# Altium PCB PCB_Mach_DK_Relay_1_Kenh.PcbDoc
Units mil, origin at the board's own origin, x right, y up, seen from the top; angles counter-clockwise.
Board outline 2685 x 1765 mil, 2 copper layers (Top Layer, Bottom Layer); 24 components, 19 nets, 81 pads, 0 vias.
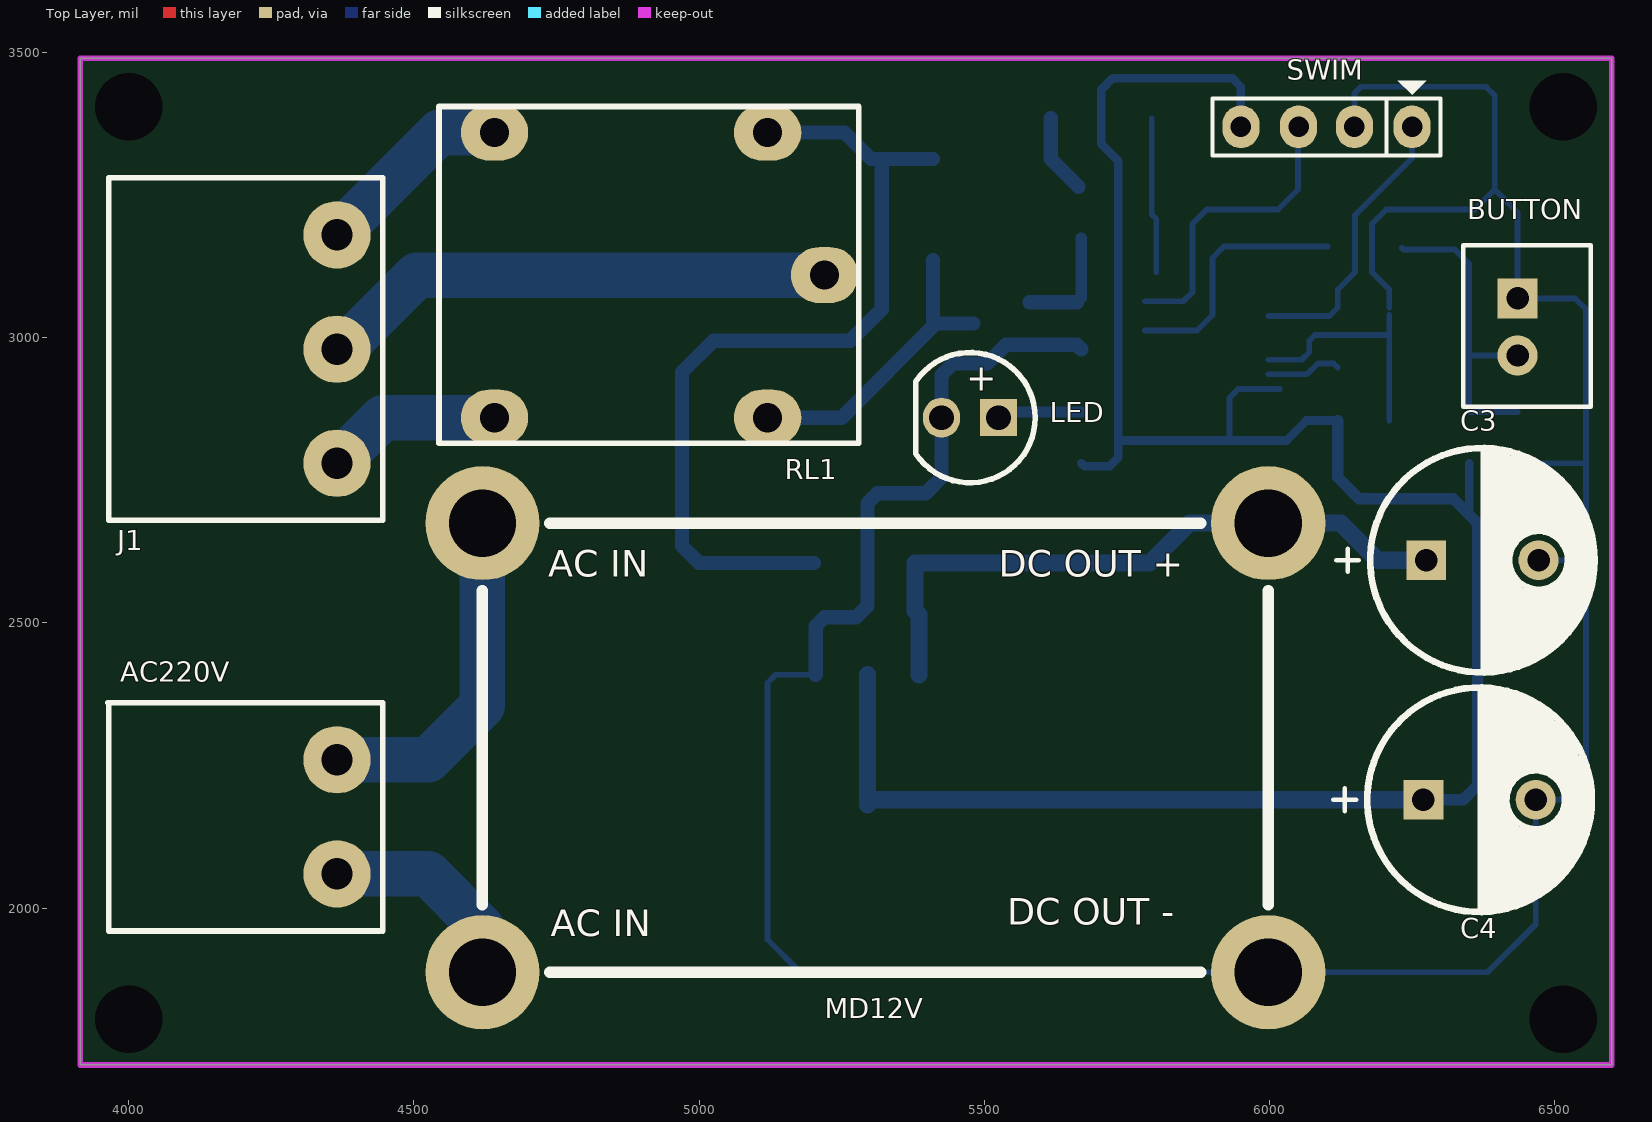
[diagram p0: Top Layer view]
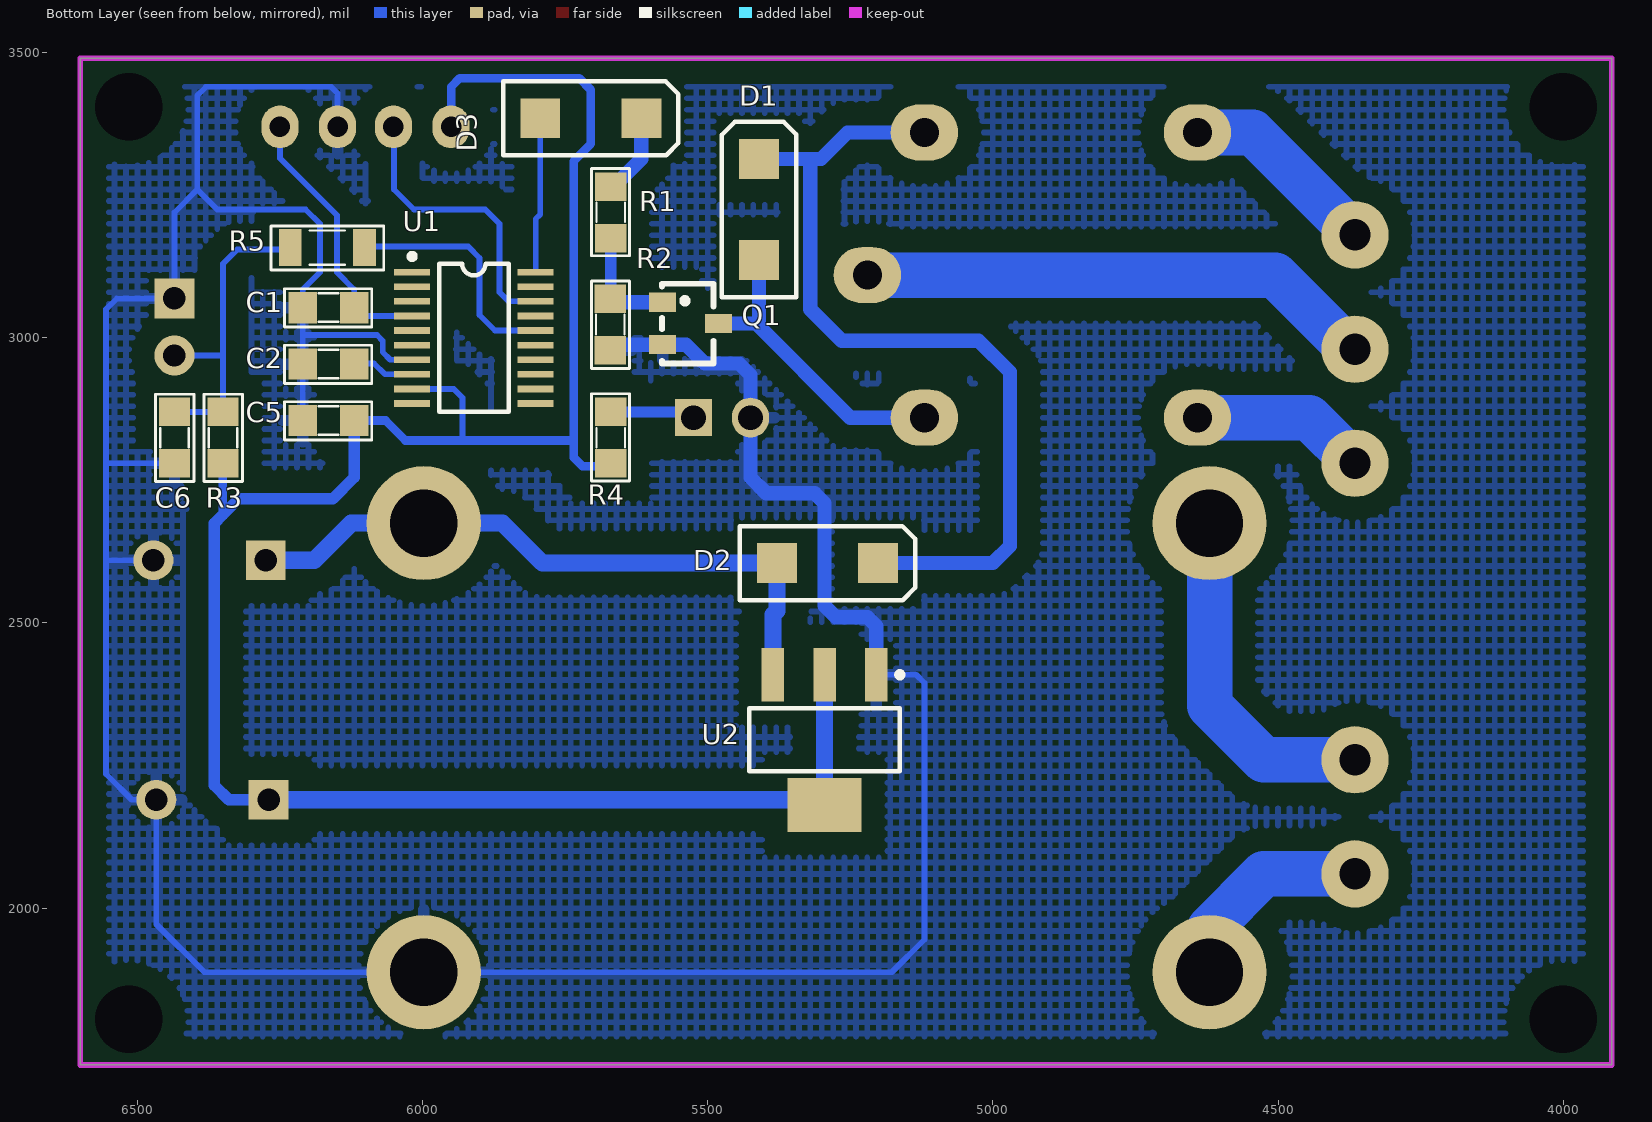
[diagram p1: Bottom Layer view, seen from below]

## Layer stack, top to bottom
Top Solder: solder mask 0.4, Solder Resist, Dk 3.5
Top Layer: signal copper 1.4
Dielectric 1: dielectric 12.6, FR-4, Dk 4.8
Bottom Layer: signal copper 1.4
Bottom Solder: solder mask 0.4, Solder Resist, Dk 3.5

## Board outline
3915,1725 6600,1725 6600,3490 3915,3490

## Design rules (kind name [scope] priority, off if disabled: settings)
Clearance [All] p1: gap=35
PolygonConnect [All] p1: connectstyle=Relief reliefconductorwidth=20 reliefentries=4 polygonreliefangle="90 Angle" airgapwidth=10
RoutingVias [All] p1: holewidth=28 width=50 viastyle="Through Hole" minholewidth=28 minwidth=50 maxholewidth=28 maxwidth=50
SolderMaskExpansion [All] p1: expansion=4
Width [All] p1: maxlimit=100 minlimit=10 preferedwidth=10
30 further rules are at their usual default settings.

## Components (designator, comment, footprint, x,y, rotation, side; value= is the part's Value field where it differs from the comment)
AC220V "POWER" "BIG_Header 2" 4365,2060 r90 top
BUTTON "Header 2" "Header 2 Duc Thang 2.54" 6435,3065 r0 top
C1 "104" "Tu 0805" 6165,3053 r180 bottom
C2 "105" "Tu 0805" 6165,2954 r180 bottom
C3 "470uF" "Tu Hoa 450uF - 16V" 6365,2615 r0 top
C4 "470uF" "Tu Hoa 450uF - 16V" 6360,2195 r0 top
C5 "104" "Tu 0805" 6165,2855 r180 bottom
C6 "104" "Tu 0805" 6435,2825 r90 bottom
D1 "M7" SMB 5410,3225 r270 bottom
D2 "M7" SMB 5290,2605 r0 bottom
D3 "M7" SMB 5705,3385 r0 bottom
J1 "BIG_Header 3" "BIG_Header 3" 4365,2780 r90 top
LED "LED3" "LED RED 5mm" 5475,2860 r180 top
MD12V "Module Driver LED 1x3W" "Module Driver LED" 4620,2675 r0 top
Q1 "C1815" SOT23B 5535,3020 r270 bottom
R1 "1k" "Tro SMD 0805" 5670,3220 r270 bottom
R2 "10k" "Tro SMD 0805" 5671,3023.5 r90 bottom
R3 "10k" "Tro SMD 0805" 6350,2825 r90 bottom
R4 "1k" "Tro SMD 0805" 5670,2825 r270 bottom
R5 "0R" "1206 SMD" 6165,3155 r0 bottom
RL1 "Relay ?V - 10A" RELAY5PIN-10A 5220,3110 r90 top
SWIM "JP4" JP4 6150,3370 r180 top
U1 "STM8S003F3 UFQFPN20P" TSSOP20 5910,3000 r270 bottom
U2 "AMS1117-5V" SOT223-4N 5295,2295 r270 bottom

## Footprints (in the part's own frame and the unit in brackets; to place one, negate y for a bottom-side part, rotate by r counter-clockwise, add the part's x,y. Pads: shape width x height; smd on the part's side, far side on the other; paste and mask are expansions set on the pad)
"1206 SMD" [mil]
  rect 40x65 smd: 1(-63,-3) 2(67,-3)
  silkscreen extent -97,-41 101,36, body extent -81,-38 85,33, height 25
"BIG_Header 2" [mm]
  round 3 hole 1.4: 1(0,0) 2(5.08,0)
  silkscreen extent -2.54,-2.03 7.62,10.21, body extent -2.5,-1.75 7.58,10.25, height 3.15
"BIG_Header 3" [mm]
  round 3 hole 1.4: 1(0,0) 2(5.08,0) 3(10.173,0)
  silkscreen extent -2.54,-2.03 12.71,10.16, body extent -2.5,-1.75 12.67,10.25, height 3.15
"Header 2 Duc Thang 2.54" [mil]
  rect 70x70 hole 39.37 unplated: 1(0,4)
  round 70 hole 39.37 unplated: 2(0,-96)
  silkscreen extent -95,-186 128,97, body extent -70,-156 107,76, height 237
JP4 [mil] "Jumper 4"
  oval 65x75 hole 36: 1(-100,0) 2(1,0) 3(99,0) 4(200,0)
  silkscreen extent -150,-81 250,50, body extent -148,-48 248,50, height 323
"LED RED 5mm" [mil] "LED phi 5mm"
  rect 65x65 hole 43.31: 1(-50,0)
  oval 65x70 hole 43.31: 2(50,0)
  silkscreen extent -114,-114 95,114, body extent -118,-118 98,118, height 353
"Module Driver LED" [mm]
  round 5.08 hole 3: 1(0,0) 2(0,-20) 3(35,0) 4(35,-20)
  silkscreen extent 0,-20 35,0
RELAY5PIN-10A [mm]
  oval 2.5x3 hole 1.3: 1(0,0) 2(-6.35,14.7) 3(6.35,14.7) 4(-6.35,2.54) 5(6.35,2.54)
  silkscreen extent -7.49,-1.52 7.51,17.18, body extent -7.49,-1.52 7.49,17.14, height 16
SMB [mil]
  rect 70x70 smd: 1(88.58,0) 2(-88.58,0)
  silkscreen extent -154,-65 154,65, body extent -102,-51 102,51, height 95
SOT23B [mm] "SOT 23B"
  rect 0.85x1.2 smd: 1(-1.077,-1.123) 2(-0.127,1.377) 3(0.813,-1.118)
  silkscreen extent -1.91,-1.14 1.65,1.14, body extent -1.63,-1.17 1.37,1.33, height 1.06
SOT223-4N [mm] "SOT223, 4-Leads, Body 6.5x3.5mm, Pitch 2.3mm, Lead Span 7mm, IPC Medium Density"
  rect 2.4x1 smd: 1(-2.9,2.3) 2(-2.9,0) 3(-2.9,-2.3)
  rect 2.4x3.3 smd: 4(2.9,0)
  silkscreen extent -3.02,-3.35 1.4,3.47, body extent -3.39,-3.27 3.5,3.23, height 1.72
"Tro SMD 0805" [mil]
  rect 50x55 smd: 1(-45,0) 2(45,0)
  silkscreen extent -77,-34 76,33, body extent -62,-28 56,27, height 21
TSSOP20 [mm] "Shrink Small Outline; 20 Leads; Body Width 4.4 mm; Pitch 0.65 mm"
  rect 0.3x1.6 smd: 1(-2.925,-2.75) 2(-2.275,-2.75) 3(-1.625,-2.75) 4(-0.975,-2.75) 5(-0.325,-2.75) 6(0.325,-2.75) 7(0.975,-2.75) 8(1.625,-2.75) 9(2.275,-2.75) 10(2.925,-2.75) 11(2.925,2.75) 12(2.275,2.75) 13(1.625,2.75) 14(0.975,2.75) 15(0.325,2.75) 16(-0.325,2.75) 17(-0.975,2.75) 18(-1.625,2.75) 19(-2.275,2.75) 20(-2.925,2.75)
  silkscreen extent -3.75,-2.87 3.3,1.55, body extent -3.3,-3.3 3.3,3.3, height 1.12
"Tu 0805" [mil] "Compoment SMD 80x50mil"
  rect 50x55 smd: 1(-45,0) 2(45,0)
  silkscreen extent -77,-34 76,33, body extent -40,-27 40,23, height 24
"Tu Hoa 450uF - 16V" [mil]
  rect 70x70 hole 39.37 unplated: 1(-90,-5)
  round 70 hole 39.37 unplated: 2(106.85,-5)
  silkscreen extent -248,-202 205,192, body extent -190,-203 207,192, height 556

## Part data
AC220V: library part "Header 2", "Big Header 2"
BUTTON: library part Hed2, "Header 2 (Green)"
C1 C2 C5 C6: library part "CAP 0805"
C3 C4: library part "Cap100uF 50V"
D1 D2 D3: library part DIODE, "Diode"
LED: library part "LED 3mm", "LED 3mm"
MD12V: library part "Module DK LED 1X3w"
Q1: "NPN 600mW, ECB"
R1 R2 R3 R4: library part Res, "Resistor 1/4W"
R5: library part R1/4W, "Resistor 1/4W"
RL1: library part "Relay 10A", "Relay SPDT,10A - 12VDC 5 Pin"
U2: library part AMS1117, "AMS"

## Free pads (board coordinates)
  round 78.74 hole 118.11: 0(6515,1805) 1(6515,3405) 2(4000,3405) 3(4000,1805)

## Nets (pads, with @x,y where several pads share a name; then routed paths per layer and width w, separated by ;. In a path a pad name is that pad's centre, name@x,y a point inside that pad or via, vN(x,y) a via of type N, cw(c..) or ccw(c..) an arc to the next point about the centre after c; other vN are vias at no path point)
12V: C3.1 D2.1 MD12V.3 U2.3 | length 1151
  Bottom Layer w30: U2.3 5385.55,2514.45 5378.58,2521.42 D2.1 5790,2605 5860,2675 MD12V.3 6125,2675 6190,2610 C3.1
BUTTON: BUTTON.2 C6.2 R3.2 R5.2 | length 559.6
  Bottom Layer w10: R5.2 6235,3155 6325,3155 6350,3130 6350,2969 ; C6.2 R3.2 6350,2969 ; BUTTON.2 6350,2969
GND: BUTTON.1 C1.1 C2.1 C3.2 C4.2 C5.1 C6.1 LED.2 MD12V.4 Q1.3 R2.1 SWIM.2 U1.7 U2.1 | length 5900.3
  Bottom Layer w10: U2.1 5134.17,2409.17 5120,2395 5120,1945 5177.4,1887.6 MD12V.4 6382.6,1887.6 6466.85,1971.85 C4.2 6510,2190 6555,2235 6555,2610 ; U1.7@5998.27,2961.61 U1.7 6056.61,2961.61 6070,2975 6070,2995 6080,3005 6210,3005 ; SWIM.2 6149,3429 6160,3440 6380,3440 6395,3425 6395,3260 ; C5.1 C2.1 6210,3005 ; C1.1@6210,3040 6210,3005 ; C1.1 6210,3085 6180,3115 6180,3200 6205,3225 6360,3225 6395,3260 ; C6.1 6555,2780 ; C3.2 6555,2610 ; 6395,3260 6435,3220 BUTTON.1 6536,3069 6555,3050 6555,2780 ; 6555,2610 6555,2780
  Bottom Layer w25: U2.1 5204.45,2494.45 5220,2510 5275,2510 5295,2530 5295,2710 5312.5,2727.5 5397.5,2727.5 5425,2755 LED.2 5425,2935 5445,2955 5505,2955 5538,2988 Q1.3 5662,2988 R2.1@5670,2980
L: AC220V.1 MD12V.2 | length 371.8
  Bottom Layer w80: AC220V.1 4525,2060 4620,1965 MD12V.2
N: AC220V.2 MD12V.1 | length 614.4
  Bottom Layer w80: AC220V.2 4525,2260 4620,2355 MD12V.1
NetD1_1: D1.1 Q1.2 RL1.4 | length 542.6
  Bottom Layer w25: RL1.4 5250,2860 5415,3025 ; D1.1 5410,3030 5415,3025 ; Q1.2 5415,3025
NetD1_2: D1.2 D2.2 RL1.5 | length 1517.2
  Bottom Layer w25: RL1.5 5255,3360 5301.42,3313.58 5320,3313.58 ; D2.2 5000,2605 4970,2635 4970,2940 5025,2995 5265,2995 5320,3050 5320,3313.58 ; D1.2 5320,3313.58
NetD3_2: D3.2 R1.1 | length 140.1
  Bottom Layer w25: D3.2 5616.42,3313.58 R1.1@5665,3265
NetJ1_1: J1.1 RL1.2 | length 309.4
  Bottom Layer w80: J1.1 4445,2860 RL1.2
NetJ1_2: J1.2 RL1.1 | length 908.8
  Bottom Layer w80: J1.2 4375,2980 4505,3110 RL1.1
NetJ1_3: J1.3 RL1.3 | length 350.6
  Bottom Layer w80: J1.3 4544.5,3360 RL1.3
NetLED_1: LED.1 R4.1 | length 149.1
  Bottom Layer w20: LED.1 5535,2870 R4.1
NetQ1_1: Q1.1 R1.2 R2.2 | length 198.9
  Bottom Layer w20: R2.2@5662.4,3062.4 5670,3070 R1.2
  Bottom Layer w25: Q1.1 R2.2@5662.4,3062.4
NetR5_1: R5.1 U1.16 | length 439.8
  Bottom Layer w10: U1.16@5781.73,3012.8 U1.16 5872.8,3012.8 5900,3040 5900,3140 5920,3160 R5.1@6102,3160
RELAY: D3.1 U1.20 | length 273.2
  Bottom Layer w10: D3.1 5793.58,3216.42 5801.73,3208.27 U1.20
RST: C1.2 SWIM.1 U1.4 | length 498.6
  Bottom Layer w10: U1.4@5998.27,3038.39 6105.39,3038.39 C1.2 6120,3085 6150,3115 6150,3215 6250,3315 SWIM.1
SWIM: SWIM.3 U1.18 | length 530.2
  Bottom Layer w10: U1.18@5781.73,3063.98 U1.18 5848.98,3063.98 5865,3080 5865,3200 5890,3225 6015,3225 6050,3260 6050,3369 SWIM.3
VCAP: C2.2 U1.8 | length 132.7
  Bottom Layer w10: U1.8@5998.27,2936.02 U1.8 6066.02,2936.02 6085,2955 6112.5,2955 C2.2@6120,2947.5
VCC: C4.1 C5.2 R3.1 R4.2 SWIM.4 U1.9 U2.2 U2.4 | length 3870
  Bottom Layer w10: 5930,2820 5930,2895 5945.43,2910.43 U1.9
  Bottom Layer w15: R4.2 5675,2775 5720,2775 5735,2790 5735,2820 ; SWIM.4 5950,3440 5935,3455 5725,3455 5705,3435 5705,3340 5735,3310 5735,2820 ; C5.2 6065,2855 6030,2820 5930,2820 5735,2820 ; 6350,2690 R3.1
  Bottom Layer w20: C5.2 6120,2755 6157.5,2717.5 6322.5,2717.5 6350,2690 6365,2675 6365,2215 6340,2190 C4.1
  Bottom Layer w30: U2.2 U2.4 5304.17,2190 C4.1
pads on no net: U1.1 U1.2 U1.3 U1.5 U1.6 U1.10 U1.11 U1.12 U1.13 U1.14 U1.15 U1.17 U1.19

## Polygon pours and split planes (outlines as drawn)
GND on Bottom Layer "Top Layer-No Net" (hatched 90Degree grid 20 track 10, pour order 2): 3915,3490 6600,3490 6600,1725 3915,1725

## Keep-outs
Keep-Out Layer:
  the board outline again, w10

## Text inside footprints (layer, text, board x,y; h text height)
LED: Top Overlay "+" at 5522,2963 h80 r180
MD12V: Top Overlay "DC OUT -" at 5540,1955 h80; Top Overlay "DC OUT +" at 5525,2565 h80; Top Overlay "AC IN" at 4740,1935 h80; Top Overlay "AC IN" at 4735,2565 h80